# EAGLE board p2c-100 (EAGLE 9.1.0)

Size 91 x 55 mm. Coordinates in mm from the lower left corner, seen from the top.
Outline: 0,53 0,2 arc90 2,0 89,0 arc90 91,2 91,53 arc90 89,55 2,55 arc90 0,53
Copper layers (1*16): Top 0.035mm / dielectric 1.53mm / Bottom 0.035mm
Design rules "pban_5mil-l2": minimum track width 5mil, minimum drill 0.3mm, track to track 5mil, track to pad 0.229mm, pad to pad 5mil, via to via 5mil, smd to smd 5mil, copper to edge 0.5mm, drill to drill 0.5mm, minimum pad ring 0.15mm, minimum via ring 0.15mm, stop-mask expansion 4mil, vias tented up to drill 0.35mm, thermal gap 10mil
Net classes: 0 default: width 0.152 mm, drill 0.305 mm, clearance 0.152 mm
Holes 2 mm at 3,3 3,52 88,52 88,3
tRestrict: area 0,0 to 91,1; area 90,0 to 91,55; area 0,54 to 91,55; area 0,0 to 1,55; area 1.2,50.2 to 4.8,53.8; area 1.2,1.2 to 4.8,4.8; area 86.2,1.2 to 89.8,4.8; area 86.2,50.2 to 89.8,53.8; area 81.5,50.3 to 83.5,52.3
bRestrict: area 0,0 to 91,1; area 90,0 to 91,55; area 0,54 to 91,55; area 0,0 to 1,55; area 86.2,50.2 to 89.8,53.8; area 86.2,1.2 to 89.8,4.8; area 1.2,50.2 to 4.8,53.8; area 1.2,1.2 to 4.8,4.8; area 81.5,50.3 to 83.5,52.3

## Footprints (pad centres in the part's own frame; a part is rotated, then mirrored left to right if it is on the bottom)
1X04 = drill 1.016 long: 1 -3.81,0; 2 -1.27,0; 3 1.27,0; 4 3.81,0
ML14L = drill 0.914 octagon: 1 -7.62,-1.27; 2 -7.62,1.27; 3 -5.08,-1.27; 4 -5.08,1.27; 5 -2.54,-1.27; 6 -2.54,1.27; 7 0,-1.27; 8 0,1.27; 9 2.54,-1.27; 10 2.54,1.27; 11 5.08,-1.27; 12 5.08,1.27; 13 7.62,-1.27; 14 7.62,1.27
C025-025X050 = drill 0.813 octagon: 1 -1.27,0; 2 1.27,0
C025-024X044 = drill 0.813 octagon: 1 -1.27,0; 2 1.27,0
DIODE-1N4148 = drill 0.9 pad 1.88: A -3.81,0; C 3.81,0
POWER_JACK_PTH_BREAD = drill 1.3: GND 0,7.9; GNDBREAK 4.8,10.7; PWR 0,13.7
1X09 = drill 1.016 pad 1.88: 1 0,0; 2 2.54,0; 3 5.08,0; 4 7.62,0; 5 10.16,0; 6 12.7,0; 7 15.24,0; 8 17.78,0; 9 20.32,0
2X4 = drill 1.016 pad 1.88: 1 -3.81,-1.27; 2 -3.81,1.27; 3 -1.27,-1.27; 4 -1.27,1.27; 5 1.27,-1.27; 6 1.27,1.27; 7 3.81,-1.27; 8 3.81,1.27
1X05_1MM_RA = smd 0.6 x 1.35: 1 -2,0; 2 -1,0; 3 0,0; 4 1,0; 5 2,0 | smd 1.2 x 2: NC1 3.3,-3.675; NC2 -3.3,-3.675
DIL14 = drill 0.813 long: 1 -7.62,-3.81; 2 -5.08,-3.81; 3 -2.54,-3.81; 4 0,-3.81; 5 2.54,-3.81; 6 5.08,-3.81; 7 7.62,-3.81; 8 7.62,3.81; 9 5.08,3.81; 10 2.54,3.81; 11 0,3.81; 12 -2.54,3.81; 13 -5.08,3.81; 14 -7.62,3.81
2X04 = drill 1.016 octagon: 1 -3.81,-1.27; 2 -3.81,1.27; 3 -1.27,-1.27; 4 -1.27,1.27; 5 1.27,-1.27; 6 1.27,1.27; 7 3.81,-1.27; 8 3.81,1.27
G5V1 = drill 0.813 long: 1 -5.08,-2.54; 2 -2.54,-2.54; 5 5.08,-2.54; 6 5.08,2.54; 9 -2.54,2.54; 10 -5.08,2.54
LED_3MM-NS = drill 0.813: A -1.27,0; K 1.27,0
1X07 = drill 1.016 pad 1.88: 1 0,0; 2 2.54,0; 3 5.08,0; 4 7.62,0; 5 10.16,0; 6 12.7,0; 7 15.24,0
JST-5-PTH = drill 0.7 pad 1.6: 1 -4,0; 2 -2,0; 3 0,0; 4 2,0; 5 4,0
DIN5-RA-PTH = drill 1.4 pad 2.286: 1 7.3,12.5; 2 0,12.5; 3 -7.3,12.5; 4 5,15; 5 -5,15; 6 -5,2.8; 7 5,2.8
DIL08 = drill 0.813 offset: 1 -3.81,-3.81; 2 -1.27,-3.81; 3 1.27,-3.81; 4 3.81,-3.81; 5 3.81,3.81; 6 1.27,3.81; 7 -1.27,3.81; 8 -3.81,3.81
1X01 = drill 1.016 octagon: 1 0,0
1X02 = drill 1.016 pad 1.88: 1 0,0; 2 2.54,0
JST-2-PTH = drill 0.7 pad 1.6: 1 -1,0; 2 1,0
0204/5 = drill 0.813 octagon: 1 -2.54,0; 2 2.54,0
JST-3-PTH = drill 0.7 pad 1.6: 1 -2,0; 2 0,0; 3 2,0
RN-9 = drill 0.813 long: 1 -10.16,0; 2 -7.62,0; 3 -5.08,0; 4 -2.54,0; 5 0,0; 6 2.54,0; 7 5.08,0; 8 7.62,0; 9 10.16,0
A1353HEX = drill 0.813 long: 1 3.81,-2.54; 2 -3.81,2.54; 4 3.81,2.54; 8 -3.81,-2.54; C 3.81,0
TO92-ECB = drill 0.813 long: B 2.54,0; C 0,0; E -2.54,0
MKR1000 = drill 0.6: 3V3 22.66,34.292; 5V 22.66,39.372; A0 2.34,36.832; A1 2.34,34.292; A2 2.34,31.752; A3 2.34,29.212; A4 2.34,26.672; A5 2.34,24.132; A6 2.34,21.592; AREF 2.34,39.372; D0 2.34,19.052; D1 2.34,16.512; D2 2.34,13.972; D3 2.34,11.432; D4 2.34,8.892; D5 2.34,6.352; D6 22.66,6.352; D7 22.66,8.892; D8 22.66,11.432; D9 22.66,13.972; D10 22.66,16.512; D11 22.66,19.052; D12 22.66,21.592; D13 22.66,24.132; D14 22.66,26.672; RST 22.66,29.212; VIN 22.66,36.832 | drill 0.6 square: GND 22.66,31.752 | hole 2: 2.25,2.25; 22.75,2.25; 2.25,59.25; 22.75,59.25
1X05 = drill 1.016 pad 1.88: 1 0,0; 2 2.54,0; 3 5.08,0; 4 7.62,0; 5 10.16,0

## Placement (x,y rotation side)
A  [1X04]  20.32,13.97 180 top
ANALOG  [ML14L]  11,27.5 90 top
B  [1X04]  20.32,6.35 0 top
C1  0.1u  [C025-025X050]  10.16,44.45 90 top
C2  0.01u  [C025-024X044]  63.5,26.67 0 top
C3  0.01u  [C025-024X044]  63.5,16.51 0 top
D1  [DIODE-1N4148]  69.85,21.59 270 top
D2  [DIODE-1N4148]  25.4,24.13 270 top
DC12V  POWER_JACKPTH_BREAD  [POWER_JACK_PTH_BREAD]  0,10 270 top
DIGITAL  [1X09]  82.55,3 180 top
GND  [2X4]  48.26,16.51 0 bottom
I2C  [1X05_1MM_RA]  6,27.5 90 bottom
IC1  74LS07N  [DIL14]  63.5,36.83 270 top
JP1  [2X04]  31.75,16.51 0 top
K1  G5V1  [G5V1]  20.32,22.86 270 top
L1  [LED_3MM-NS]  62.23,52.07 270 top
L2  [LED_3MM-NS]  64.77,52.07 270 top
L3  [LED_3MM-NS]  67.31,52.07 270 top
L4  [LED_3MM-NS]  69.85,52.07 270 top
L5  [LED_3MM-NS]  72.39,52.07 270 top
L6  [LED_3MM-NS]  74.93,52.07 270 top
L7  [LED_3MM-NS]  77.47,52.07 270 top
LIGHTDRIVE  [1X07]  8.89,3 0 top
LOGO1  OSHW-LOGOS-COPPER  [OSHW-LOGO-S_COPPER]  48.26,45.5 0 top
MIDI  [JST-5-PTH]  85,27.5 90 bottom
MIDI-IN  DIN5  [DIN5-RA-PTH]  91,17.75 90 top
MIDI-OUT  DIN5  [DIN5-RA-PTH]  91,37.25 90 top
OK1  6N137  [DIL08]  63.5,10.16 270 top
POGOPIN  [1X01]  82.55,51.26 0 top
PWR1  [1X02]  8.89,51.26 0 top
PWR2  [JST-2-PTH]  6,8 270 bottom
R1  220  [0204/5]  63.5,24.13 0 top
R2  220  [0204/5]  63.5,21.59 0 top
R3  220  [0204/5]  63.5,19.05 0 top
R4  10k  [0204/5]  31.75,24.13 0 top
R5  10k  [0204/5]  31.75,21.59 0 top
R6  6.8k  [0204/5]  20.32,11.43 0 top
R7  6.8k  [0204/5]  20.32,8.89 0 top
RCV  [LED_3MM-NS]  80.01,52.07 270 top
RELAY  [JST-3-PTH]  6,44.5 90 top
RN1  330  [RN-9]  69.85,47.62 0 top
RN2  10k  [RN-9]  49.53,3 180 top
RST  [JST-2-PTH]  48.26,49 0 bottom
SW1  [A1353HEX]  31.75,6.35 180 top
T1  2SC1815  [TO92-ECB]  31.75,26.67 0 top
U1  MKR1000  [MKR1000]  42,8 0 top
U$1  PINEAPPLE450_SILK  [PINEAPPLE450_SILK]  25,49 0 top
U$3  KANAYA768_SILK  [KANAYA768_SILK]  25,42 0 top
U$4  CARDQRCODE450_SILK  [CARDQRCODE450_SILK]  48.26,36.72 0 top
U$5  HELP_P2C  [HELP_P2C]  48,36 0 bottom
XOUT  [1X05]  82.55,6.35 180 top

## Library data of the parts
A B JP1 POGOPIN = pinhead
ANALOG = con-ml; OC_FARNELL: unknown; OC_NEWARK: unknown
C1-C3 R1-R7 = resistor
D1 D2 = SparkFun-DiscreteSemi; PROD_ID: DIO-08378
DC12V = SparkFun-Connectors; PROD_ID: PRT-10811
DIGITAL GND I2C LIGHTDRIVE PWR1 XOUT = SparkFun-Connectors
IC1 = 74xx-us
K1 = relay; MPN: G5V-1-DC24; OC_FARNELL: 9949593; OC_NEWARK: 36M6377
L1-L7 RCV = SparkFun-LED
LOGO1 = SparkFun-Aesthetics
MIDI = SparkFun-Connectors; SF_ID: PRT-09917
MIDI-IN MIDI-OUT = SparkFun-Connectors; PROD_ID: CONN-09481
OK1 = optocoupler; MPN: 6N137; OC_FARNELL: 1328376; OC_NEWARK: 52M1895
PWR2 RST = SparkFun-Connectors; PROD_ID: CONN-09863; SKU: PRT-09914
RELAY = SparkFun-Connectors; PROD_ID: WIRE-10037; SF_ID: PRT-09915
RN1 RN2 = resistor-net; OC_FARNELL: unknown; OC_NEWARK: unknown
SW1 = switch-dil; OC_FARNELL: unknown; OC_NEWARK: unknown
T1 = transistor
U1 = mkr1000
U$1 U$3-U$5 = pineapple

## Nets
ANLG_0: ANALOG.2 RN2.2
ANLG_1: ANALOG.4 RN2.3
ANLG_2: ANALOG.6 RN2.4
ANLG_3: ANALOG.8 RN2.5
ANLG_4: ANALOG.10 RN2.6
ANLG_5: ANALOG.12 RN2.7
ANLG_6: ANALOG.14 RN2.8
GND: A.4 C1.2 C2.2 C3.2 DC12V.GND DC12V.GNDBREAK DIGITAL.2 GND.1 GND.2 GND.3 GND.4 GND.5 GND.6 GND.7 GND.8 I2C.5 IC1.7 JP1.1 LIGHTDRIVE.2 MIDI-OUT.2 MIDI.2 PWR1.2 PWR2.2 R4.1 RN1.1 RN2.1 RST.2 SW1.C T1.E U1.GND
I2CENABLE: B.1 JP1.2
LED1K: L1.K RN1.2
LED2K: L2.K RN1.3
LED3K: L3.K RN1.4
LED4K: L4.K RN1.5
LED5K: L5.K RN1.6
LED6K: L6.K RN1.7
LED7K: L7.K RN1.8
MIDIIN: OK1.6 RCV.A
MIDIIN+: MIDI-IN.4 MIDI.4 R3.2
MIDIIN-: D1.A MIDI-IN.5 MIDI.5 OK1.3
MIDIINA: D1.C OK1.2 R3.1
MIDIOUT: IC1.1 IC1.3 IC1.5 IC1.9 IC1.11 IC1.13
MIDIOUT+: MIDI-OUT.4 MIDI.1 R2.2
MIDIOUT-: MIDI-OUT.5 MIDI.3 R1.2
MIDIOUTC: IC1.2 R1.1
MOSI: LIGHTDRIVE.7
N$1: RCV.K RN1.9
PWM_0: A.3 DIGITAL.9 L1.A R6.1
PWM_1: DIGITAL.8 L2.A LIGHTDRIVE.3
PWM_2: DIGITAL.7 L3.A
PWM_3: DIGITAL.6 L4.A
PWM_4: DIGITAL.5 L5.A
PWM_5: DIGITAL.4 L6.A
PWM_6: DIGITAL.3 JP1.8 L7.A
RELAYCOM: K1.5 K1.6 RELAY.2
RELAYDRIVE: R4.2 R5.1 T1.B
RELAYNC: K1.1 RELAY.3
RELAYNO: K1.10 RELAY.1
RELAYTR: D2.A K1.9 T1.C
RLYDRV: JP1.7 R5.2
RST: RST.1
SCL: B.3 I2C.3
SCLK: LIGHTDRIVE.6
SDA: B.2 I2C.4
SW0: JP1.3 SW1.1
SW1: JP1.5 SW1.2
SW_0: A.2 JP1.4 R7.1
SW_1: I2C.2 JP1.6
SW_2: LIGHTDRIVE.4 SW1.4
SW_3: LIGHTDRIVE.5 SW1.8
VCC: A.1 ANALOG.1 ANALOG.3 ANALOG.5 ANALOG.7 ANALOG.9 ANALOG.11 ANALOG.13 C1.1 C2.1 C3.1 D2.C IC1.14 K1.2 LIGHTDRIVE.1 OK1.7 R2.1 R6.2 R7.2
VDD: B.4 DIGITAL.1 I2C.1
VIN: DC12V.PWR PWR1.1 PWR2.1 U1.VIN
X1: IC1.4 XOUT.1
X2: IC1.6 XOUT.2
X3: IC1.8 XOUT.3
X4: IC1.10 XOUT.4
X5: IC1.12 XOUT.5

## Tracks (layer width: path | path; a pad name or v marks a point on that pad's centre or on a via)
ANLG_0  (1 unrouted)
ANLG_1  (1 unrouted)
ANLG_2  (1 unrouted)
ANLG_3  (1 unrouted)
ANLG_4  (1 unrouted)
ANLG_5  (1 unrouted)
ANLG_6  (1 unrouted)
GND  (29 unrouted)
I2CENABLE  (1 unrouted)
LED1K  (1 unrouted)
LED2K  (1 unrouted)
LED3K  (1 unrouted)
LED4K  (1 unrouted)
LED5K  (1 unrouted)
LED6K  (1 unrouted)
LED7K  (1 unrouted)
MIDIIN  (1 unrouted)
MIDIIN+  (2 unrouted)
MIDIIN-  (3 unrouted)
MIDIINA  (2 unrouted)
MIDIOUT  (5 unrouted)
MIDIOUT+  (2 unrouted)
MIDIOUT-  (2 unrouted)
MIDIOUTC  (1 unrouted)
N$1  (1 unrouted)
PWM_0  (3 unrouted)
PWM_1  (2 unrouted)
PWM_2  (1 unrouted)
PWM_3  (1 unrouted)
PWM_4  (1 unrouted)
PWM_5  (1 unrouted)
PWM_6  (2 unrouted)
RELAYCOM  (2 unrouted)
RELAYDRIVE  (2 unrouted)
RELAYNC  (1 unrouted)
RELAYNO  (1 unrouted)
RELAYTR  (2 unrouted)
RLYDRV  (1 unrouted)
SCL  (1 unrouted)
SDA  (1 unrouted)
SW0  (1 unrouted)
SW1  (1 unrouted)
SW_0  (2 unrouted)
SW_1  (1 unrouted)
SW_2  (1 unrouted)
SW_3  (1 unrouted)
VCC  (18 unrouted)
VDD  (2 unrouted)
VIN  (3 unrouted)
X1  (1 unrouted)
X2  (1 unrouted)
X3  (1 unrouted)
X4  (1 unrouted)
X5  (1 unrouted)

## Text on the board
tNames: Vin | GND | USB>> | N.O. | Com. | How to make | N.C. | Ichi KANAYA, Ph.D. | Founder, Pineapple Computer / Founder, TEDxSaikai / Professor, Univ. of Nagasaki / https://pineapple.cc/card / kanaya@pineapple.cc, @kanaya | MC1 | D2 | D7 | D13 | IC2 | Vcc | GND | D5 | D8 | D12 | SC | MO | NC | A6 | A5 | A4 | A3 | A2 | A1 | A0 | G | D3 | D5 | D6 | D9 | D10 | D11 | D13 | GND | 3V3
bNames: Pineapple IIc 1.2.0 | 4-M2 | MC1: Arduino Micro 5V / SW1: Comp. HEX / Con 5V: Pin 2p / Con Analog: ML 14p / Con DC: DC Jack / Con Digital: Pin 9p / Con GND: Pin 2x4p / Con Lightdrive: Pin 7p / Con I2C: SH 5p / Con MIDI: DIN 5p/PH 5p / Con Relay: PH 3p / Con RST: PH 2p / Con XOUT: Pin 5p / Pogo: Pin 1p | R1-3: 220 / R4-5: 10k / R6-7: 6.8k / RN1: 330 / RN2: 10k / C1: 0.1u / C2-3: 0.01u / K1: G5V-1 / D1-2: 1N4148 / LED1-8: If20m / T1: 2SC1815 / OK1: TLP552 / IC1: 74LS07 / IC2: PCA9517ADP | 91x55mm | 5 | IN | 4 | 5 | OUT | 3 | 4 | LIGHTDRIVE | ANALOG | DIGITAL